# EAGLE board LAYOUT_BOARD 24V (06-07-2025) (EAGLE 9.7.0)
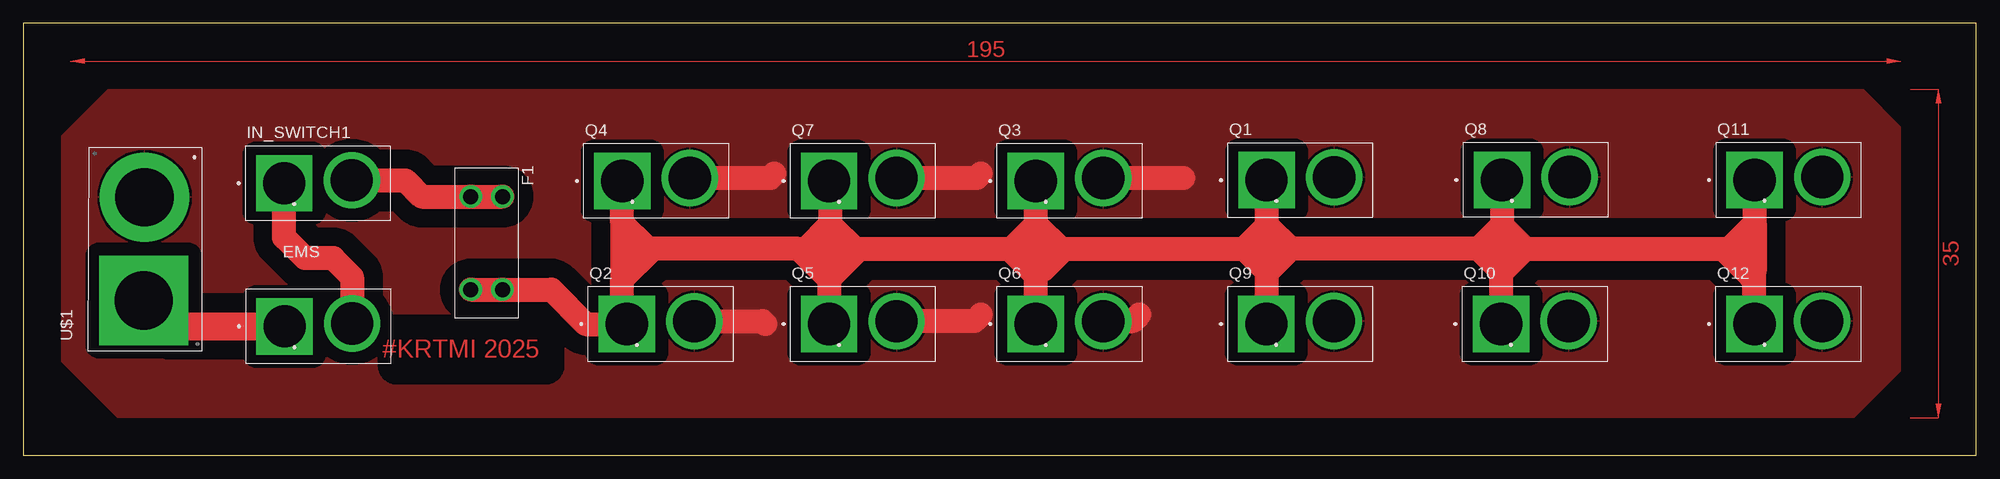
[diagram p0: board, top side]

Size 208 x 46 mm. Coordinates in mm from the lower left corner, seen from the top.
Outline: 0,0 208,0 208,46 0,46 0,0
Copper layers (1*16): Top / Bottom
Stack-up Default Layer Stack: Top SilkScreen Epoxy Ink / Top SolderMask SR:Green 0.0254mm Dk 4.3 / Top Surface Finish Lead-Free 0.02mm / Top CuFoil:007 0.035mm / Dielectric-1 User Defined 1.5mm / Bottom CuFoil:007 0.035mm / Bottom Surface Finish Lead-Free 0.02mm / Bottom SolderMask SR:Green 0.0254mm Dk 4.3 / Bottom SilkScreen Epoxy Ink
Design rules: minimum copper width 6mil, minimum drill size 0.35mm, copper clearance wire_polygon to wire_polygon 1.7mm, copper clearance wire_polygon to pad_smd 1.4mm, copper clearance wire_polygon to via 6mil, copper clearance pad_smd to pad_smd 6mil, copper clearance pad_smd to via 6mil, copper clearance via to via 6mil, copper clearance smd to pad (same net) 6mil, copper clearance smd to via (same net) 6mil, copper clearance smd to smd (same net) 6mil, dimension clearance 40mil, via restrict clearance 0mil, restrict clearance 0mil, drill distance 6mil, keepout clearance 0mil

## Footprints (pad centres in the part's own frame; a part is rotated, then mirrored left to right if it is on the bottom)
AMASS_XT60PB-M = drill 4.5 pad 6 square: 1 -3.6,0 | drill 4.5 pad 6: 2 3.6,0.305
FUSE_3568-20 = drill 1.6: 1 -4.96,1.7; 2 4.96,1.7; 3 -4.96,-1.7; 4 4.96,-1.7
AMASS_XT90PB-M = drill 6.2 pad 9.5 square: 1 -5.5,0.2 | drill 6.2 pad 9.5: 2 5.5,0.105

## Placement (x,y rotation side)
EMS  XT60_YELLOW  [AMASS_XT60PB-M]  31.41,13.74 0 top
F1  3568-20  [FUSE_3568-20]  49.34,22.61 270 top
IN_SWITCH1  XT60_YELLOW  [AMASS_XT60PB-M]  31.37,28.99 0 top
Q1  XT60_YELLOW  [AMASS_XT60PB-M]  136.02,29.32 0 top
Q2  XT60_YELLOW  [AMASS_XT60PB-M]  67.87,13.99 0 top
Q3  XT60_YELLOW  [AMASS_XT60PB-M]  111.43,29.23 0 top
Q4  XT60_YELLOW  [AMASS_XT60PB-M]  67.39,29.23 0 top
Q5  XT60_YELLOW  [AMASS_XT60PB-M]  89.41,13.99 0 top
Q6  XT60_YELLOW  [AMASS_XT60PB-M]  111.43,13.99 0 top
Q7  XT60_YELLOW  [AMASS_XT60PB-M]  89.41,29.23 0 top
Q8  XT60_YELLOW  [AMASS_XT60PB-M]  161.1,29.34 0 top
Q9  XT60_YELLOW  [AMASS_XT60PB-M]  136,14 0 top
Q10  XT60_YELLOW  [AMASS_XT60PB-M]  161,14 0 top
Q11  XT60_YELLOW  [AMASS_XT60PB-M]  188.02,29.33 0 top
Q12  XT60_YELLOW  [AMASS_XT60PB-M]  188,14 0 top
U$1  XT90  [AMASS_XT90PB-M]  13,22 90 top

## Library data of the parts
EMS IN_SWITCH1 Q1-Q12 = XT60_YELLOW; AVAILABILITY: Not in stock; CHECK_PRICES: https://www.snapeda.com/parts/XT60%20YELLOW/Pololu/view-part/?ref=eda; DESCRIPTION: Power connector; 65A; PIN: 2; Colour: yellow; MF: Pololu; MP: XT60 YELLOW; PACKAGE: None; PRICE: None; SNAPEDA_LINK: https://www.snapeda.com/parts/XT60%20YELLOW/Pololu/view-part/?ref=snap
F1 = 3568-20; AVAILABILITY: In Stock; CHECK_PRICES: https://www.snapeda.com/parts/356820/Keystone/view-part/?ref=eda; DESCRIPTION: Fuse Holder 30 A 500V 1 Circuit Blade Through Hole; MF: Keystone Electronics; MP: 356820; PACKAGE: None; PRICE: None; SNAPEDA_LINK: https://www.snapeda.com/parts/356820/Keystone/view-part/?ref=snap
U$1 = XT60_YELLOW

## Nets
24V: F1.2 F1.4 Q1.1 Q2.1 Q3.1 Q4.1 Q5.1 Q6.1 Q7.1 Q8.1 Q9.1 Q10.1 Q11.1 Q12.1
GND: Q1.2 Q2.2 Q3.2 Q4.2 Q5.2 Q6.2 Q7.2 Q8.2 Q9.2 Q10.2 Q11.2 Q12.2 U$1.2
N$1: EMS.1 U$1.1
N$4: EMS.2 IN_SWITCH1.1
POWER: F1.1 F1.3 IN_SWITCH1.2

## Tracks (layer width: path | path; a pad name or v marks a point on that pad's centre or on a via)
24V
  Top 2.54: F1.4 F1.2 56.24,17.65 59.9,13.99 63.79,13.99 | 63.79,13.99 63.79,18.74 | 63.79,24.71 63.79,18.74 | 63.79,24.71 Q4.1 | 63.79,24.71 66.15,22.36 65.79,22 66.78,22 | 66.78,22 66.78,21.74 63.79,18.74 | 82.56,22 66.78,22 | 82.56,22 83.35,22 | 83.35,22 87,22 85.81,23.19 Q5.1 | 86,24.65 86,24.57 88.57,22 89.08,22 | 86,24.65 86,29.04 Q7.1 | 82.56,22 85.82,18.74 89.08,22 | 89.08,22 105,22 | 105,22 105.83,22 105.92,22.09 105.63,22.37 107.83,24.57 | 107.83,22 107.83,24.57 | 107.83,19.79 107.83,20 107.42,19.59 105,22 | 107.83,19.79 Q6.1 | 83.35,22 86,24.65 | Q2.1 63.79,13.99 | Q3.1 107.83,24.67 | 107.83,24.67 107.83,24.57 | 110.89,22 110.5,22 107.83,24.67 | 110.89,22 130,22 | 130,22 132.42,24.42 132.42,24.58 | Q1.1 132.42,24.58 | 130,22 132.4,19.6 132.4,19.4 | 132.4,19.4 Q9.1 | 130,22 135,22 | 155,22 135,22 | 157.5,24.5 155,22 | Q8.1 157.5,24.5 | 155,22 157.4,19.6 | 157.4,19.6 Q10.1 | 155,22 160,22 | 160,22 181,22 | 181,22 181.7,22 184.42,24.71 | 184.42,24.71 184.42,19.62 184.4,19.6 Q12.1 | 184.42,24.71 Q11.1 | 157.5,24.5 160,22 | 160,22 157.6,19.6 157.4,19.6 | 132.42,24.58 135,22 | 135,22 132.4,19.4 | 110.89,22 108.67,19.79 107.83,19.79 | 181,22 184,19
GND
  Top 2.54: 71,14.29 70.99,14.29 78.7,14.29 79,14 | Q4.2 79.53,29.54 80,30 | 123.53,29.54 Q3.2 | Q7.2 101.53,29.54 102,30 | Q5.2 101.3,14.29 102,15 | Q6.2 118.16,14.29 118.86,15
  pour Top: 4,34 9,39 196,39 200,35 200,9 195,4 10,4 4,10
N$1
  Top 3: U$1.1 15.56,13.74 EMS.1
N$4
  Top 2.54: EMS.2 35.01,18.99 33,21 30,21 27.77,23.23 IN_SWITCH1.1
POWER
  Top 2.54: IN_SWITCH1.2 40.7,29.3 42.43,27.57 F1.3 F1.1
(copper drawn outside any net)
  shapes: Top area x2

## Text on the board
Top: #KRTMI 2025